# Altium PCB PCB1.PcbDoc
Units mil, origin at the board's own origin, x right, y up, seen from the top; angles counter-clockwise.
Board outline 3275 x 4315 mil, 2 copper layers (Top Layer, Bottom Layer); 25 components, 45 nets, 165 pads, 0 vias.
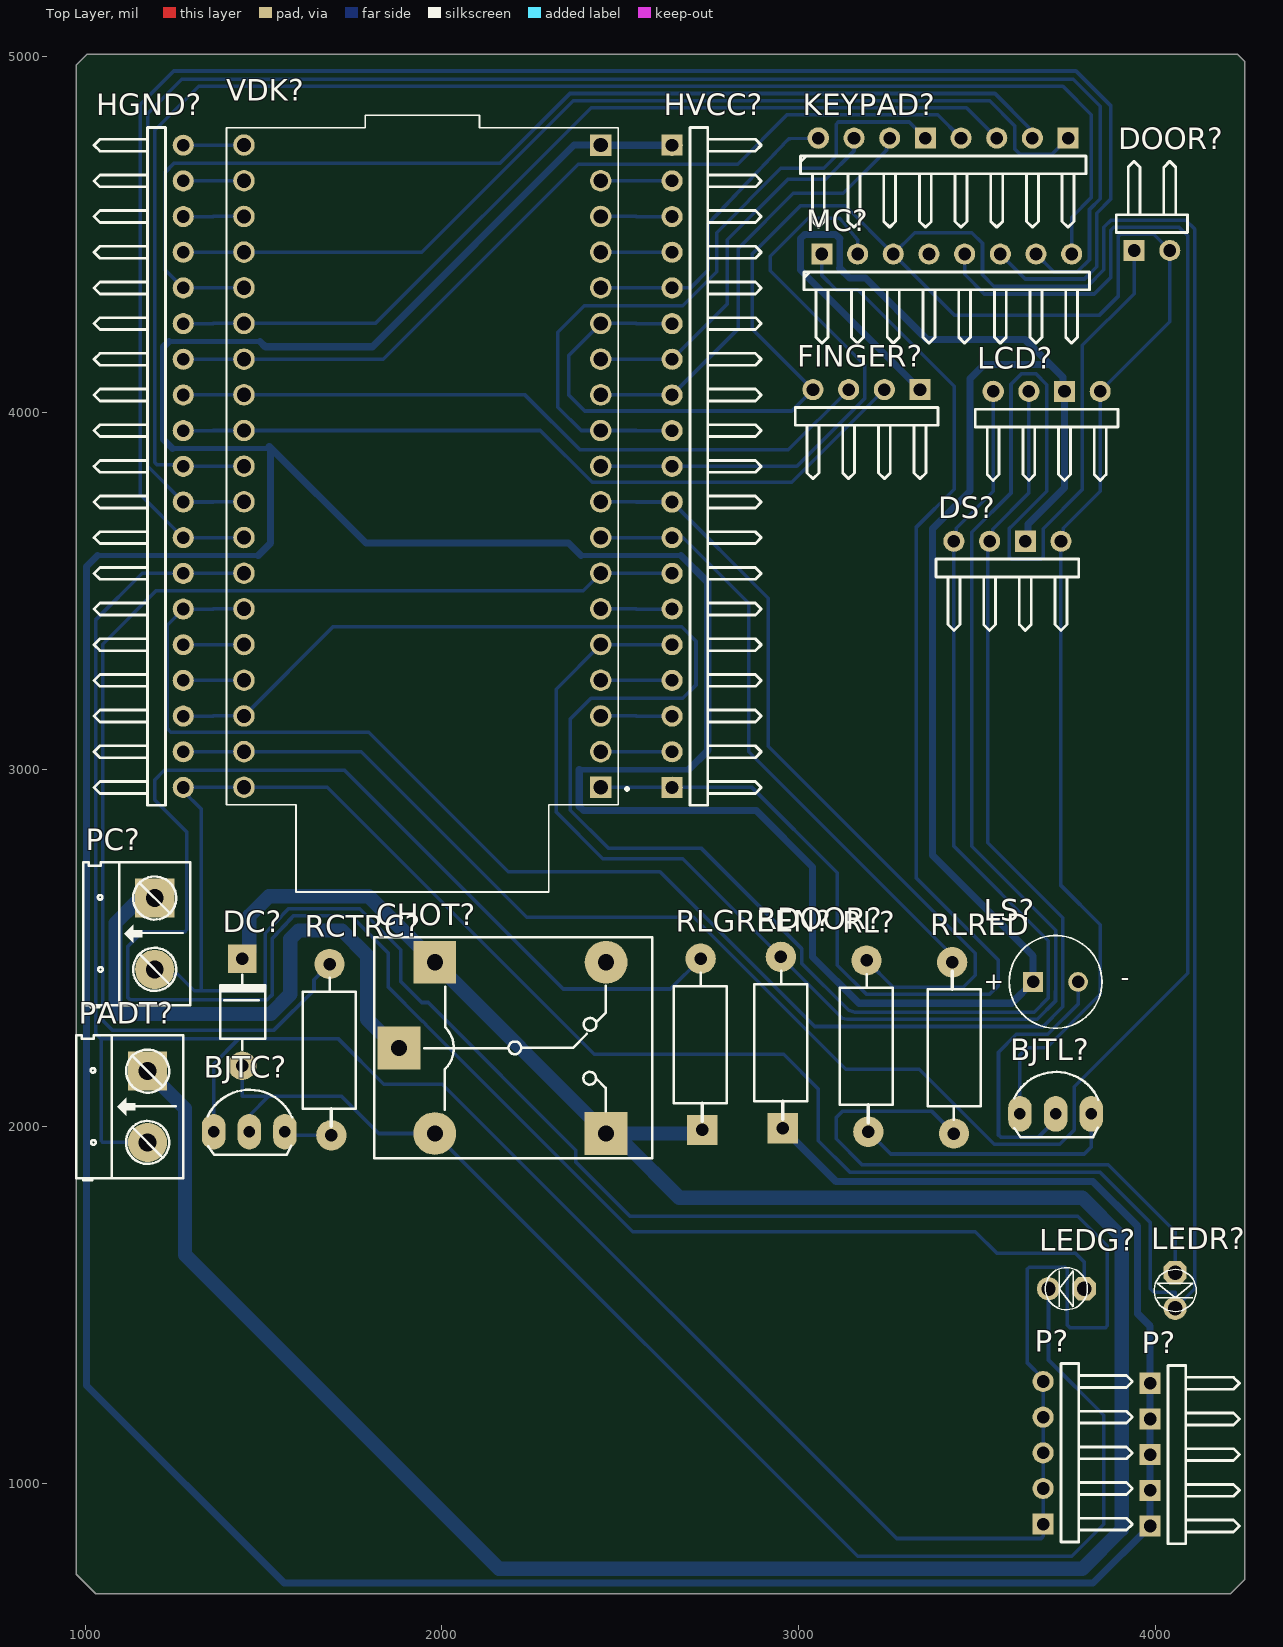
[diagram p0: Top Layer view]
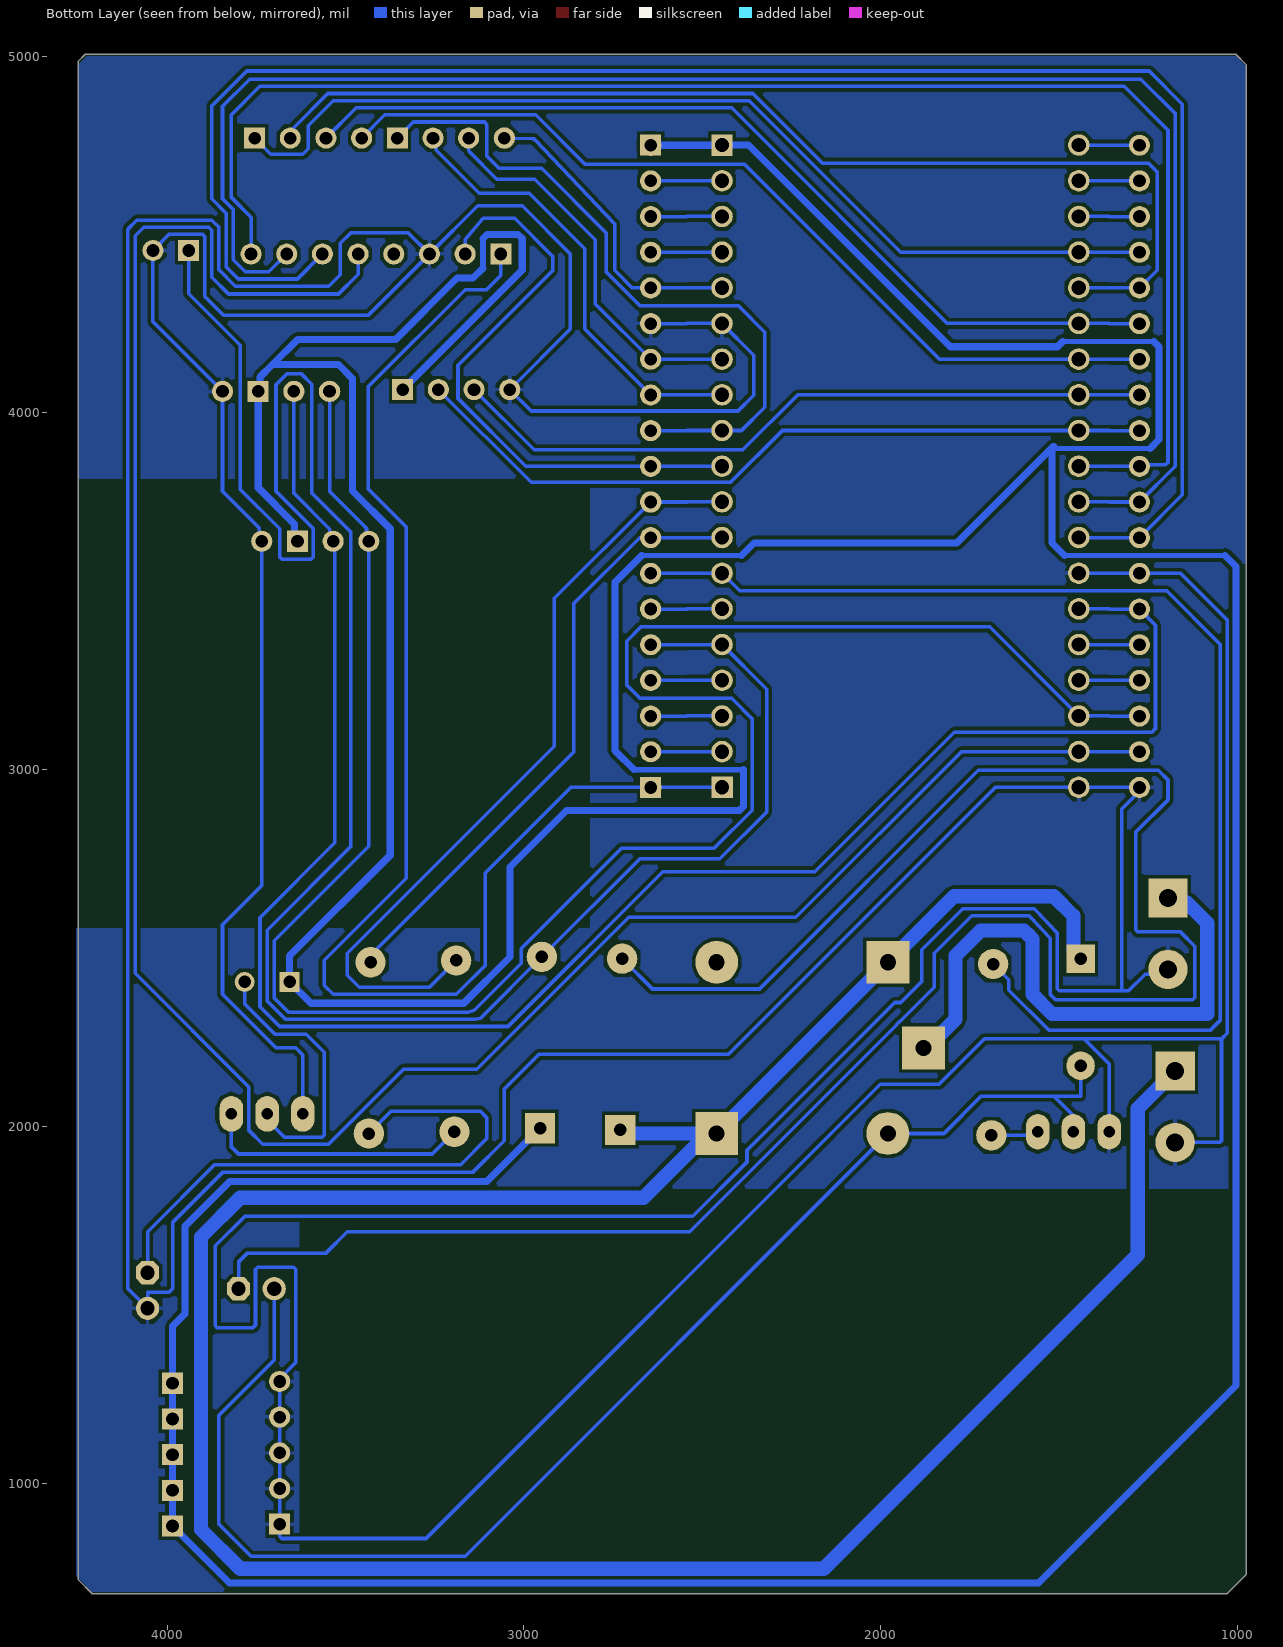
[diagram p1: Bottom Layer view, seen from below]
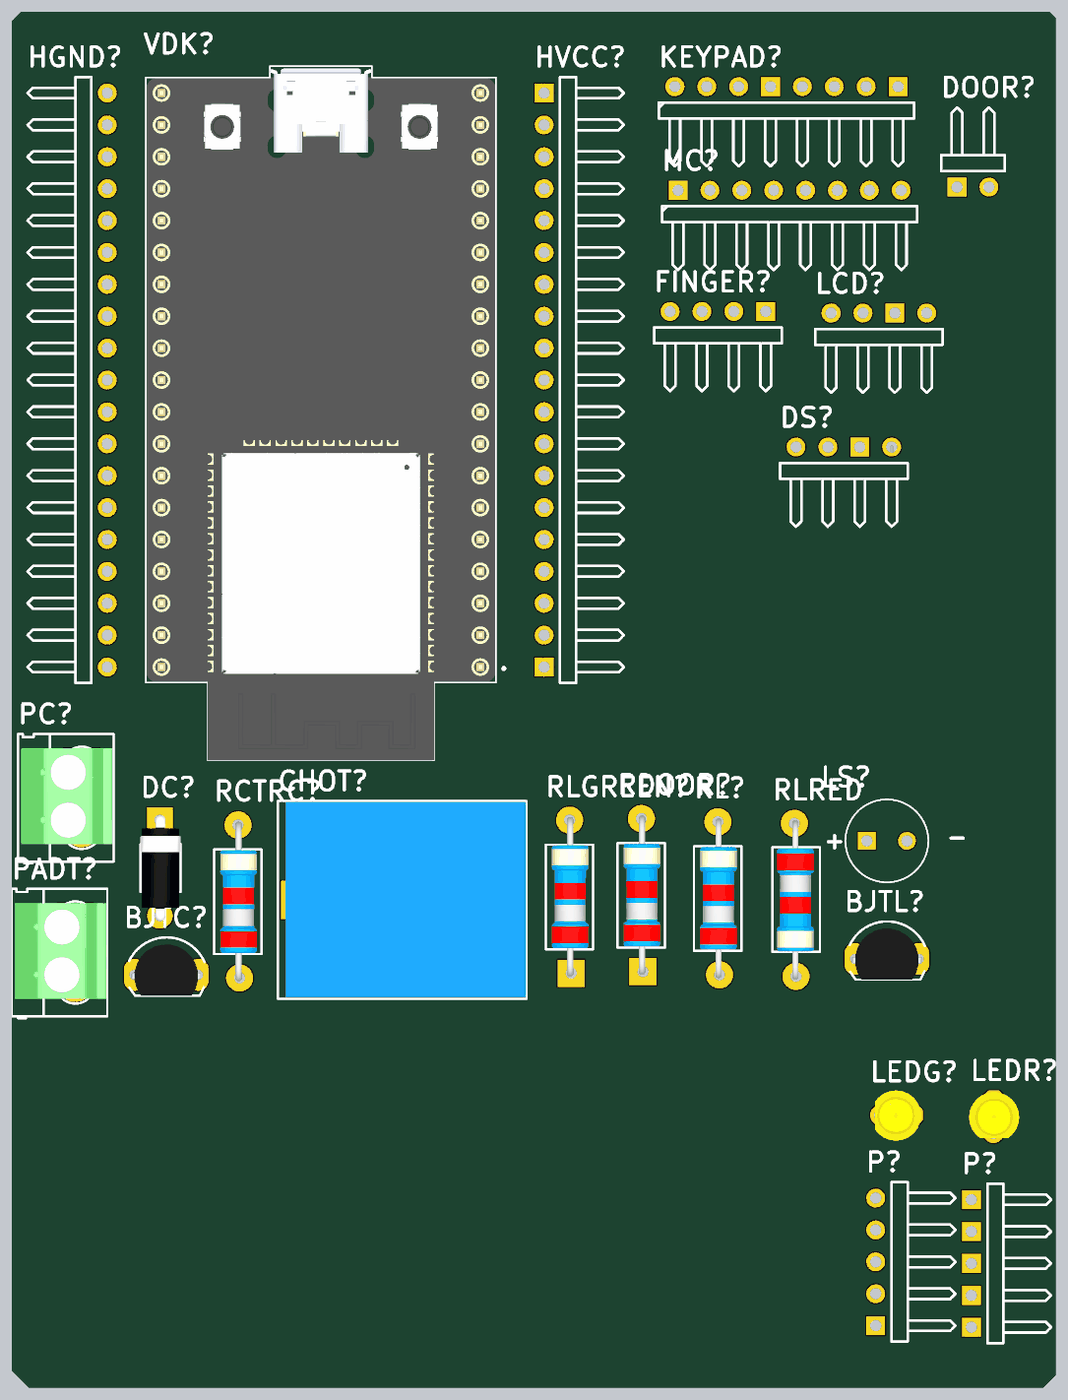
[diagram p2: 3D render of the assembled board from above, using the file's embedded part models]

## Layer stack, top to bottom
Top Solder: solder mask 0.4, Solder Resist, Dk 3.5
Top Layer: signal copper 1.4
Dielectric 1: dielectric 12.6, FR-4, Dk 4.8
Bottom Layer: signal copper 1.4
Bottom Solder: solder mask 0.4, Solder Resist, Dk 3.5

## Board outline
975,745 975,4975 1005,5005 4230,5005 4250,4985 4250,730 4210,690 1030,690

## Design rules (kind name [scope] priority, off if disabled: settings)
Clearance [All] p1: gap=10 ignorepadtopadclearanceinfootprint=FALSE except(0: Arc-Hole Track-Hole SMDPad-Hole THPad-Hole Via-Hole Fill-Hole Poly-Hole Region-Hole Text-Hole)
PolygonConnect [All] p1: connectstyle=Relief reliefconductorwidth=10 reliefentries=4 polygonreliefangle="90 Angle" airgapwidth=10
RoutingVias [All] p1: holewidth=28 width=50 viastyle="Through Hole" minholewidth=28 minwidth=50 maxholewidth=28 maxwidth=50
SolderMaskExpansion [All] p1: expansion=4 istentingtop=FALSE
Width [All] p1: maxlimit=50 minlimit=10 preferedwidth=10 toplayer_maxwidth=10 minimp=50.000000 maximp=50.000000 favimp=50.000000
30 further rules are at their usual default settings.

## Classes and differential pairs
component class Sheet2: BJTC? BJTL? CHOT? DC? DOOR? DS? FINGER? HGND? HVCC? KEYPAD? LCD? LEDG? LEDR? LS? MC? P? PADT? PC? RCTRC? RDOOR? RL? RLRED VDK?

## Components (designator, comment, footprint, x,y, rotation, side; value= is the part's Value field where it differs from the comment)
BJTC? "C1815" TO92 1460,1985 r0 top value=C9014
BJTL? "C1815" TO92 3720,2035 r0 top value=C9014
CHOT? "Relay 10A/12V" "RELAY 5" 2205,2220 r0 top value="Relay SPDT, 10A, 12V"
DC? "100v" "DIODE 1A" 1440,2120 r270 top
DOOR? "Header 2H" HDR1X2H 4040,4455 r180 top
DS? "Header 4H" HDR1X4H#1 3435,3640 r0 top
FINGER? "Header 4H" HDR1X4H#2 3040,4065 r0 top
HGND? "Header 19H" HDR1X19H#1 1275,4750 r270 top
HVCC? "Header 19H" HDR1X19H#2 2645,2950 r90 top
KEYPAD? "Header 8H" HDR1X8H#1 3055,4770 r0 top
LCD? "Header 4H" HDR1X4H#1 3545,4060 r0 top
LEDG? "LED" LED-3MM-YELLOW 3800,1545 r180 top value="LED 3 ly Single Colour"
LEDR? "LED" LED-3MM-YELLOW 4055,1590 r270 top value="LED 3 ly Single Colour"
LS? "CMT-6635C-030" CUI_CMT-6635C-030 3720,2405 r0 top
MC? "Header 8H" HDR1X8H#2 3065,4445 r0 top
P? "Header 5H" HDR1X5H#1 3685,885 r90 top
P? "Header 5H" HDR1X5H#2 3985,880 r90 top
PADT? "CON 2 KF301" "Con 2 KF301 5.08" 1175,1955 r90 top
PC? "CON 2 KF301" "Con 2 KF301 5.08" 1195,2440 r90 top
RCTRC? "Res" RES-1/2W#1 1685,2195 r90 top
RDOOR? "Res" RES-1/2W#2 2950,2215 r90 top
RL? "Res" RES-1/2W#1 3190,2205 r90 top
RLGREEN? "Res" RES-1/2W#2 2725,2210 r90 top
RLRED "Res" RES-1/2W#1 3435,2240 r270 top
VDK? "ESP32-DEVKITC" MODULE_ESP32-DEVKITC 1945,3850 r180 top

## Footprints (in the part's own frame and the unit in brackets; to place one, negate y for a bottom-side part, rotate by r counter-clockwise, add the part's x,y. Pads: shape width x height; smd on the part's side, far side on the other; paste and mask are expansions set on the pad)
"Con 2 KF301 5.08" [mil]
  round 110 hole 50: 1(0,0)
  rect 110x110 hole 50: 2(200,0)
  silkscreen extent -106,-100 300,200, body extent -45,-97 255,190, height 335
CUI_CMT-6635C-030 [mm]
  round 1.408 hole 0.9: N(1.6,0)
  rect 1.408x1.408 hole 0.9: P(-1.6,0)
  silkscreen extent -3.3,-3.3 3.3,3.3
"DIODE 1A" [mil] "Diode 1A"
  round 80 hole 35: 1(-50,0)
  rect 80x80 hole 35: 2(-350,0)
  silkscreen extent -305,-61 -95,65, body extent -366,-61 -34,65, height 122
HDR1X2H [mm] "Connector; Header; 2 Position; Right Angle"
  round 1.5 hole 0.9: 1(0,0)
  rect 1.5x1.5 hole 0.9: 2(2.54,0)
  silkscreen extent -1.27,-6.35 3.81,-1.27
HDR1X4H#1 [mm] "Connector; Header; 4 Position; Right Angle"
  round 1.5 hole 0.9: 1(0,0) 2(2.54,0) 4(7.62,0)
  rect 1.5x1.5 hole 0.9: 3(5.08,0)
  silkscreen extent -1.27,-6.35 8.89,-1.27
HDR1X4H#2 [mm] "Connector; Header; 4 Position; Right Angle"
  round 1.5 hole 0.9: 1(0,0) 2(2.54,0) 3(5.08,0)
  rect 1.5x1.5 hole 0.9: 4(7.62,0)
  silkscreen extent -1.27,-6.35 8.89,-1.27
HDR1X5H#1 [mm] "Connector; Header; 5 Position; Right Angle"
  rect 1.5x1.5 hole 0.9: 1(0,0)
  round 1.5 hole 0.9: 2(2.54,0) 3(5.08,0) 4(7.62,0) 5(10.16,0)
  silkscreen extent -1.27,-6.35 11.43,-1.27
HDR1X5H#2 [mm] "Connector; Header; 5 Position; Right Angle"
  rect 1.5x1.5 hole 0.9: 1(0,0) 2(2.54,0) 3(5.08,0) 4(7.62,0) 5(10.16,0)
  silkscreen extent -1.27,-6.35 11.43,-1.27
HDR1X8H#1 [mm] "Connector; Header; 8 Position; Right Angle"
  round 1.5 hole 0.9: 1(0,0) 2(2.54,0) 3(5.08,0) 5(10.16,0) 6(12.7,0) 7(15.24,0)
  rect 1.5x1.5 hole 0.9: 4(7.62,0) 8(17.78,0)
  silkscreen extent -1.27,-6.35 19.05,-1.27
HDR1X8H#2 [mm] "Connector; Header; 8 Position; Right Angle"
  rect 1.5x1.5 hole 0.9: 1(0,0)
  round 1.5 hole 0.9: 2(2.54,0) 3(5.08,0) 4(7.62,0) 5(10.16,0) 6(12.7,0) 7(15.24,0) 8(17.78,0)
  silkscreen extent -1.27,-6.35 19.05,-1.27
HDR1X19H#1 [mm] "Connector; Header; 19 Position; Right Angle"
  round 1.5 hole 0.9: 1(0,0) 2(2.54,0) 3(5.08,0) 4(7.62,0) 5(10.16,0) 6(12.7,0) 7(15.24,0) 8(17.78,0) 9(20.32,0) 10(22.86,0) 11(25.4,0) 12(27.94,0) 13(30.48,0) 14(33.02,0) 15(35.56,0) 16(38.1,0) 17(40.64,0) 18(43.18,0) 19(45.72,0)
  silkscreen extent -1.27,-6.35 46.99,-1.27
HDR1X19H#2 [mm] "Connector; Header; 19 Position; Right Angle"
  rect 1.5x1.5 hole 0.9: 1(0,0) 19(45.72,0)
  round 1.5 hole 0.9: 2(2.54,0) 3(5.08,0) 4(7.62,0) 5(10.16,0) 6(12.7,0) 7(15.24,0) 8(17.78,0) 9(20.32,0) 10(22.86,0) 11(25.4,0) 12(27.94,0) 13(30.48,0) 14(33.02,0) 15(35.56,0) 16(38.1,0) 17(40.64,0) 18(43.18,0)
  silkscreen extent -1.27,-6.35 46.99,-1.27
LED-3MM-YELLOW [mil]
  oct 65x65 hole 40: 1(0,0)
  round 65 hole 40: 2(100,0)
  silkscreen extent -9,-59 109,59, body extent -27,-77 117,80, height 181
MODULE_ESP32-DEVKITC [mm]
  rect 1.53x1.53 / inner round 1.53 / far side rect 1.53x1.53 hole 1.02: 1(-12.7,22.85)
  round 1.53 hole 1.02: 2(-12.7,20.31) 3(-12.7,17.77) 4(-12.7,15.23) 5(-12.7,12.69) 6(-12.7,10.15) 7(-12.7,7.61) 8(-12.7,5.07) 9(-12.7,2.53) 10(-12.7,-0.01) 11(-12.7,-2.55) 12(-12.7,-5.09) 13(-12.7,-7.63) 14(-12.7,-10.17) 15(-12.7,-12.71) 16(-12.7,-15.25) 17(-12.7,-17.79) 18(-12.7,-20.33) 19(-12.7,-22.87) 20(12.7,-22.87) 21(12.7,-20.33) 22(12.7,-17.79) 23(12.7,-15.25) 24(12.7,-12.71) 25(12.7,-10.17) 26(12.7,-7.63) 27(12.7,-5.09) 28(12.7,-2.55) 29(12.7,-0.01) 30(12.7,2.53) 31(12.7,5.07) 32(12.7,7.61) 33(12.7,10.15) 34(12.7,12.69) 35(12.7,15.23) 36(12.7,17.77) 37(12.7,20.31) 38(12.7,22.85)
  silkscreen extent -14.67,-25 13.95,30.3, body extent -13.97,-24.8 13.97,30.3, height 3.25
"RELAY 5" [mil] "Reley DPDT, 8 pin, 1A, W400mil, L800mil,H 300mil"
  rect 120x120 hole 45: 1(-325,0) 3(255,-240) 5(-225,240)
  round 120 hole 45: 2(255,240) 4(-225,-240)
  silkscreen extent -395,-310 385,310, body extent -371,-304 381,306, height 602
RES-1/2W#1 [mil]
  round 85 hole 35: 1(-220,-5) 2(260,0)
  silkscreen extent -195,-74 221,75, body extent -230,-60 270,56, height 121
RES-1/2W#2 [mil]
  rect 85x85 hole 35: 1(-220,-5)
  round 85 hole 35: 2(260,0)
  silkscreen extent -195,-74 221,75, body extent -230,-60 270,56, height 121
TO92 [mil] "TO-92"
  oval 66x100 hole 32: 1(-100,0) 2(0,0) 3(100,0)
  silkscreen extent -117,-65 120,118, body extent -109,-66 109,95, height 245

## Part data
BJTC? BJTL?: "NPN transistor"
CHOT?: library part "Relay 5", "Relay SPDT,10A - 12VDC 5 Pin"
DC?: library part "Diode 1N4007", "Cắm", Chung_Loai=Cắm, Don_Vi=Con, Ma_Hang=MH001063, Ten_Linh_Kien="Diode 1N4007 1A (DIP)"
DOOR?: "Header, 2-Pin, Right Angle", LatestRevisionDate=17-Jul-2002, LatestRevisionNote="Re-released for DXP Platform.", Publisher="Altium Limited"
DS? FINGER? LCD?: "Header, 4-Pin, Right Angle", LatestRevisionDate=17-Jul-2002, LatestRevisionNote="Re-released for DXP Platform.", Publisher="Altium Limited"
HGND? HVCC?: "Header, 19-Pin, Right Angle", LatestRevisionDate=17-Jul-2002, LatestRevisionNote="Re-released for DXP Platform.", Publisher="Altium Limited"
KEYPAD? MC?: "Header, 8-Pin, Right Angle", LatestRevisionDate=17-Jul-2002, LatestRevisionNote="Re-released for DXP Platform.", Publisher="Altium Limited"
LEDG? LEDR?: "LED Single colour Green and Red"
LS?: "6.6 mm, 3 Vo-p, 80 dB, Through Hole, Magnetic Audio Transducer Buzzer", Package="CUI Inc.", Availability=Unavailable, CUI_purchase_URL=https://www.cuidevices.com/product/audio/buzzers/audio-transducers/cmt-6635c-030?utm_source=snapeda.com&utm_medium=referral&utm_campaign=snapedaBOM, MF="CUI Devices", MP=CMT-6635C-030, Price=None, SnapEDA_Link=https://www.snapeda.com/parts/CMT-6635C-030/CUI%20Devices/view-part/2773120/?ref=snap
P? P?: "Header, 5-Pin, Right Angle", LatestRevisionDate=17-Jul-2002, LatestRevisionNote="Re-released for DXP Platform.", Publisher="Altium Limited"
PADT? PC?: "Cắm", Chung_Loai=Cắm, Don_Vi=Con, Ma_Hang=MH000987, Ten_Linh_Kien="CON 2 KF301-2P 5.08MM Xanh Dương"
RCTRC? RDOOR? RL? RLGREEN? RLRED: Manufacturer="Generic Components", Class=Passive, Published=08/06/2000, Publisher="Altium Hobart Technology Centre", SubClass=R
VDK?: "ESP32-WROOM-32UE series Transceiver; 802.11 b/g/n (Wi-Fi, WiFi, WLAN), Bluetooth Â® Smart Ready 4.x Dual Mode Evaluation Board", Package=None, Availability="In Stock", Check_prices=https://www.snapeda.com/parts/ESP32-DEVKITC/Espressif+Systems/view-part/?ref=eda, MF="Espressif Systems", MP=ESP32-DEVKITC, Price=None, Purchase-URL=https://pricing.snapeda.com/search/part/ESP32-DEVKITC/?ref=eda, SnapEDA_Link=https://www.snapeda.com/parts/ESP32-DEVKITC/Espressif+Systems/view-part/?ref=snap

## Free pads (board coordinates)
  round 60 hole 30: 62(2460,2460) 64(2725,2470) 67(3190,2465) 90(2445,2950.39) 91(2645,2950) 93(2445,3050.39) 94(2445,3150.39) 106(2645,3750) 118(2445,4250.39) 122(2445,4450.39) 123(2445,4550.39) 125(2445,4650.39) 127(2645,4750) 129(3055,4770) 152(3545,4060)
  rect 60x60 hole 30: 126(2445,4750.39)

## Nets (pads, with @x,y where several pads share a name; then routed paths per layer and width w, separated by ;. In a path a pad name is that pad's centre, name@x,y a point inside that pad or via, vN(x,y) a via of type N, cw(c..) or ccw(c..) an arc to the next point about the centre after c; other vN are vias at no path point)
3V3: HVCC?.1 MC?.1 pad.90 pad.91 VDK?.1 | length 3895.1
  Bottom Layer w10: pad.90 2612.62,2950.39 2613.02,2950 pad.91 2869,2950 3108,2711 3108,2452 3190,2370 3534.69,2370 3559.75,2395.06 3559.75,2465.25 3330,2695 3330,3680 3436,3786 3436,4074 3165,4345 3105,4345 3065,4385 MC?.1
12V: CHOT?.3 CHOT?.5 DC?.2 PADT?.2 RLGREEN?.1 | length 7662.2
  Bottom Layer w10: RLGREEN?.1@2730,1980 RLGREEN?.1
  Bottom Layer w40: PADT?.2 1280,2050 1280,1640 2160,760 3795,760 3905,870 3905,1690 3795,1800 2665,1800 2517.35,1947.65 2514,1947.65 2485,1976.65 CHOT?.3@2485,1980 ; DC?.2 1460,2490 1460,2590 1515,2645 1795,2645 CHOT?.5 CHOT?.3 CHOT?.3@2485,1980 ; RLGREEN?.1@2730,1980 CHOT?.3@2485,1980
BUZZER: HVCC?.9 pad.67 pad.106 RL?.2 VDK?.9 | length 2228.7
  Bottom Layer w10: VDK?.9 2544,3750.39 2544.39,3750 pad.106 2915,3480 2915,3065 3495,2485 3495,2423.5 3461.5,2390 3265,2390 pad.67
C0: HVCC?.11 KEYPAD?.4 VDK?.11 | length 1966.6
  Bottom Layer w10: HVCC?.11 2544.39,3950 2544,3950.39 VDK?.11 2390.61,3950.39 2325,4016 2325,4226 2399,4300 2675,4300 2770,4395 2770,4505 2950,4685 3070,4685 3105,4720 3105,4809.14 3110.86,4815 3310,4815 KEYPAD?.4
C1: HVCC?.12 KEYPAD?.3 VDK?.12 | length 1254.8
  Bottom Layer w10: VDK?.12 2544,4050.39 2544.39,4050 HVCC?.12 2830,4235 2830,4460 2985,4615 3125,4615 3246.01,4736.01 3246.01,4761.01 KEYPAD?.3
C2: HVCC?.13 KEYPAD?.2 VDK?.13 | length 1093.5
  Bottom Layer w10: VDK?.13 2544,4150.39 2544.39,4150 HVCC?.13 2800,4305 2800,4485 2970,4655 3076,4655 3155,4734 KEYPAD?.2
C3: HVCC?.15 KEYPAD?.1 pad.129 VDK?.15 | length 863.2
  Bottom Layer w10: VDK?.15 2544,4350.39 2544.39,4350 HVCC?.15 2696.72,4350 2745.86,4399.14 2745.86,4525.16 2745.86,4529.14 2969.08,4764.83 2972,4767.75 2975.98,4767.85 pad.129
CLK: HGND?.11 MC?.7 VDK?.30 | length 4669
  Bottom Layer w10: VDK?.30 1359.39,3750.39 1359,3750 HGND?.11 1175,3850 1175,4839 1271,4935 3769,4935 3845,4859 3845,4600 3815,4570 3815,4429 3781,4395 3715,4395 MC?.7
CRX: HGND?.16 VDK?.35 | length 170.2
  Bottom Layer w10: HGND?.16 1359,3250 1359.39,3250.39 VDK?.35
CTRL_C: HVCC?.7 RCTRC?.2 VDK?.7 | length 3474.2
  Bottom Layer w10: RCTRC?.2 1641.39,2411.39 1641.39,2381.89 1529.5,2270 1075.86,2270 1049.14,2296.72 1049.14,3351.72 1198.42,3501 2395.61,3501 VDK?.7 2477.16,3550.39 2477.56,3550 HVCC?.7
CTX: HGND?.15 VDK?.34 | length 170.2
  Bottom Layer w10: HGND?.15 1359,3350 1359.39,3350.39 VDK?.34
DOOR: DOOR?.2 HVCC?.5 RDOOR?.2 VDK?.5 | length 5969.4
  Bottom Layer w10: HVCC?.5 2544.39,3350 2544,3350.39 VDK?.5 2320,3225.39 2320,2881 2451,2750 2675,2750 RDOOR?.2 3122.07,2302.93 3135.74,2300.19 3137.71,2300 3668.28,2300 3719.72,2351.44 3719.72,2364 3719.72,2364.08 3720,2397.02 3720,2550 3485,2785 3485,3665 3595,3775 3595,4080 3625,4110 3664,4110 3695,4079 3695,3780.27 3602.6,3687.87 3590.47,3675.74 3590.47,3595.86 3596.33,3590 3679.14,3590 3685,3595.86 3685,3675 3795,3785 3795,4189 3940,4334 DOOR?.2
GND: BJTC?.1 BJTL?.1 DOOR?.1 DS?.4 FINGER?.1 HGND?.13 HGND?.19 HVCC?.14 LCD?.4 LEDR?.2 MC?.3 P?.1@3685,885 P?.2@3685,985 P?.3@3685,1085 P?.4@3685,1185 P?.5@3685,1285 pad.118 PADT?.1 PC?.1 VDK?.14 VDK?.32 VDK?.38 | length 24588
  Bottom Layer w10: PADT?.1 1050,1955 1045,1960 1045,2245 ; PC?.1 1208.28,2426.72 1259.14,2426.72 1305.86,2380 1325,2380 ; BJTC?.1 1360,2175 1430,2245 ; VDK?.32 1359.39,3550.39 1359,3550 HGND?.13 1160,3550 1029.14,3419.14 1029.14,2260.86 1045,2245 ; HVCC?.14 2544.39,4250 2544,4250.39 pad.118 2356,4161.39 2356,4049 2400,4005 2980,4005 FINGER?.1 2870,4235 2870,4445 3005,4580 3130,4580 MC?.3 ; BJTL?.1 3620,2200 3640,2220 3695,2220 3845,2370 3845,2565 3735,2675 DS?.4 3741.49,3646.49 3741.49,3676.49 3845,3780 LCD?.4 4040,4255 DOOR?.1 3995,4500 3900.86,4500 3895,4494.14 3895,4326 3843,4274 3436,4274 MC?.3 ; 1045,2245 1430,2245 ; 1325,2380 1499.14,2380 1505,2385.86 1505,2540.86 1564.14,2604.14 1570,2610 1770,2610 1885,2495 1885,2405.86 1943.64,2347.22 1961.24,2347.22 2375,1933.46 2375,1900 2527,1748 3782,1748 3865,1665 3865,1440.86 3859.14,1435 3760.86,1435 3752.5,1443.36 3752.5,1599.14 3746.64,1605 3645.86,1605 3640,1599.14 3640,1338 3685,1293 3685,1285 3685,1185 3685,1085 3685,985 3685,885 3685,850.86 3682.07,847.93 3679.14,845 3274.6,845 2001.21,2118.39 1836.61,2118.39 1710,2245 1430,2245 ; 1325,2380 1325,2889.61 1275,2939.61 HGND?.19 1372,2950 1372.39,2950.39 VDK?.38 1678.61,2950.39 2427,2202 2958,2202 3055,2105 3055,1960 3143,1872 3843.64,1872 3985,1730.64 3985,1545 3995,1535 4055,1535 LEDR?.2 4110,1545 4110,4515 4085,4540 3875,4540 3855,4520 3855,4400.72 3809.28,4355 3547,4355 3515,4387 3515,4475 3485,4505 3325,4505 MC?.3
LEDR: HVCC?.8 RLRED.1 VDK?.8 | length 1733.4
  Bottom Layer w10: VDK?.8 2544,3650.39 2544.39,3650 HVCC?.8 2675.93,3650 2860,3465.93 2860,3050 3430,2480 RLRED.1
MISO: HGND?.12 MC?.6 VDK?.31 | length 5014.9
  Bottom Layer w10: VDK?.31 1359,3650.39 1359,3650 HGND?.12 1155,3770 1155,4865 1248,4958 3777,4958 3875,4860 3875,4599.53 3835,4559.53 3835,4409 3801,4375 3635,4375 MC?.6
MOSI: HGND?.18 MC?.5 VDK?.37 | length 6476.6
  Bottom Layer w10: HGND?.18 1359,3050 1359.39,3050.39 VDK?.37 1773.61,3050.39 2238,2586 2706,2586 3132,2160 3337.93,2160 3547.93,1950 3732,1950 3772,1990 3772,2111 4090,2429 4090,4496 4066,4520 3883.28,4520 3875,4511.72 3875,4380 3828,4333 3520,4333 3465,4388 MC?.5
NetBJTC?_2: BJTC?.2 CHOT?.4 DC?.1 LEDG?.2 | length 3939.9
  Bottom Layer w10: DC?.1 1440,2085 1515,2085 ; BJTC?.2 1460,2030 1515,2085 ; LEDG?.2@3700,1566.32 3700,1345 3855,1190 3855,885 3765,795 3165,795 CHOT?.4 1823,1980 1718,2085 1515,2085
NetBJTC?_3: BJTC?.3 RCTRC?.1 | length 134.1
  Bottom Layer w10: BJTC?.3 1570,1975 RCTRC?.1
NetBJTL?_2: BJTL?.2 LS?.N | length 772.4
  Bottom Layer w10: BJTL?.2 3720,2018 3672,1970 3565.86,1970 3560,1975.86 3560,2208 3610,2258 3698,2258 3782.99,2342.99 LS?.N
NetBJTL?_3: BJTL?.3 RL?.1 | length 751.9
  Bottom Layer w10: RL?.1 3257.5,1922.5 3800.43,1922.5 3820,1942.07 BJTL?.3
NetHGND?_1: HGND?.1 VDK?.20 | length 170.2
  Bottom Layer w10: HGND?.1 1359,4750 1359.39,4750.39 VDK?.20
NetHGND?_2: HGND?.2 VDK?.21 | length 170.2
  Bottom Layer w10: HGND?.2 1359,4650 1359.39,4650.39 VDK?.21
NetHGND?_3: HGND?.3 VDK?.22 | length 170.2
  Bottom Layer w10: HGND?.3 1359,4550 1359.39,4550.39 VDK?.22
NetHVCC?_2: HVCC?.2 pad.93 VDK?.2 | length 200.2
  Bottom Layer w10: pad.93 2544,3050.39 2544.39,3050 HVCC?.2
NetHVCC?_3: HVCC?.3 pad.94 VDK?.3 | length 200.2
  Bottom Layer w10: pad.94 2544,3150.39 2544.39,3150 HVCC?.3
NetHVCC?_4: HVCC?.4 VDK?.4 | length 200.2
  Bottom Layer w10: VDK?.4 2544,3250.39 2544.39,3250 HVCC?.4
NetHVCC?_6: HVCC?.6 VDK?.6 | length 200.2
  Bottom Layer w10: VDK?.6 2544,3450.39 2544.39,3450 HVCC?.6
NetHVCC?_16: HVCC?.16 pad.122 VDK?.16 | length 200.2
  Bottom Layer w10: pad.122 2544,4450.39 2544.39,4450 HVCC?.16
NetHVCC?_17: HVCC?.17 pad.123 VDK?.17 | length 200.2
  Bottom Layer w10: pad.123 2544,4550.39 2544.39,4550 HVCC?.17
NetHVCC?_18: HVCC?.18 pad.125 VDK?.18 | length 200.2
  Bottom Layer w10: pad.125 2544,4650.39 2544.39,4650 HVCC?.18
NetLEDG?_1: LEDG?.1 pad.64 RLGREEN?.2 | length 6022.3
  Bottom Layer w10: pad.64 2640,2385 2340,2385 1727,2998 1222,2998 1195,2971 1195,2915 1285,2825 1285,2550.86 1279.14,2545 1160,2545 1120,2505 1120,2360.86 1125.86,2355 1510.5,2355 1525,2369.5 1525,2526.92 1578.08,2584.14 1583.93,2590 1745,2590 1850,2485 1850,2390 1945,2295 1946.21,2295 1955,2286.21 1955,2285 2535,1705 3495,1705 3555,1645 3775,1645 3800,1620 LEDG?.1
NetLEDR?_1: LEDR?.1 RLRED.2 | length 1596.2
  Bottom Layer w10: RLRED.2 3372,2043 3123,2043 3105,2025 3105,1965 3177.4,1892.6 3867.4,1892.6 4055,1705 LEDR?.1
PC: CHOT?.1 PC?.2 | length 1618.2
  Bottom Layer w10: 1084.14,2315.86 1085,2315
  Bottom Layer w40: PC?.2 1181.61,2626.61 1141.61,2626.61 1085,2570 1085,2315 1520,2315 1575,2370 1575,2525.33 1586.72,2537.05 1598.43,2548.76 1719.87,2548.76 1790.54,2478.09 1790.54,2300.54 1871.09,2220 CHOT?.1
R0: HGND?.4 KEYPAD?.8 VDK?.23 | length 2774.9
  Bottom Layer w10: HGND?.4 1359,4450 1359.39,4450.39 VDK?.23 1943.87,4450.39 2368.47,4875 3535,4875 3605,4805 3605,4740 3620,4725 3710,4725 KEYPAD?.8
R1: HGND?.5 KEYPAD?.7 VDK?.24 | length 3100.5
  Bottom Layer w10: VDK?.24 1359.39,4350.39 1359,4350 HGND?.5 1225,4400 1225,4675 1250,4700 2163.78,4700 2358.78,4895 3550,4895 3645.61,4799.39 3645.61,4779.39 KEYPAD?.7
R2: HGND?.6 KEYPAD?.6 VDK?.25 | length 2565.8
  Bottom Layer w10: HGND?.6 1359,4250 1359.39,4250.39 VDK?.25 1813.55,4250.39 2418.16,4855 3470,4855 KEYPAD?.6
R3: HGND?.7 KEYPAD?.5 VDK?.26 | length 2490.7
  Bottom Layer w10: HGND?.7 1359,4150 1359.39,4150.39 VDK?.26 1835.39,4150.39 2382,4697 2829.04,4697 2967.04,4835 3390,4835 KEYPAD?.5
RQ: MC?.4
RSTSPI: HVCC?.10 MC?.2 VDK?.10 | length 1684.5
  Bottom Layer w10: VDK?.10 2475,3850.39 2475,3850 HVCC?.10 2995,3850 3185,4040 3185,4133.34 2920,4398.34 2920,4438.64 3026.36,4545 3114.61,4545 3117.54,4542.07 3117.87,4541.74 3165,4485 MC?.2
RX2: FINGER?.2 HGND?.8 VDK?.27 | length 1999.2
  Bottom Layer w10: HGND?.8 VDK?.27@1445,4050 ; VDK?.27 VDK?.27@1445,4050 ; FINGER?.2 2971,3896 2387,3896 2233,4050 VDK?.27@1445,4050
SCL: DS?.1 HGND?.17 LCD?.1 pad.152 VDK?.36 | length 5796.1
  Bottom Layer w10: HGND?.17 1359,3150 1359.39,3150.39 VDK?.36 1694.61,3400 2672,3400 2712,3360 2712,3237 2675,3200 2418,3200 2360,3142 2360,2886.36 2466.36,2780 2726.32,2780 3008,2498.32 3008,2457 3139.84,2325.16 3157.03,2320.37 3159.52,2320 3660,2320 3699.72,2359.72 3699.72,2520.28 3435,2785 DS?.1 3441.49,3646.49 3441.49,3676.49 3545,3780 LCD?.1
SDA: DS?.2 HGND?.14 LCD?.2 VDK?.33 | length 5262.1
  Bottom Layer w10: VDK?.33 1359.39,3450.39 1359,3450 HGND?.14 1230,3405 1230,3115 1240,3105 1794.53,3105 2185.53,2714 2611,2714 3045,2280 3685,2280 3740,2335 3740,2585 3530,2795 3530,3545.72 3530,3635 3543.99,3648.99 3543.99,3673.99 3645,3775 LCD?.2
SS: HGND?.10 MC?.8 VDK?.29 | length 4308
  Bottom Layer w10: VDK?.29 1359.39,3850.39 1359,3850 HGND?.10 1270,3855 1200.86,3855 1195,3860.86 1195,4792 1318,4915 3740.54,4915 3820,4835.54 3820,4603.29 3765,4548.29 MC?.8
TX2: FINGER?.3 HGND?.9 VDK?.28 | length 2133.1
  Bottom Layer w10: HGND?.9 1359,3950 1359.39,3950.39 VDK?.28 2275.61,3950.39 2421,3805 2980,3805 FINGER?.3
VCC: DS?.3 FINGER?.4 HVCC?.19 LCD?.3 LS?.P P?.1@3985,880 P?.2@3985,980 P?.3@3985,1080 P?.4@3985,1180 P?.5@3985,1280 pad.126 pad.127 RDOOR?.1 VDK?.19 | length 18734.5
  Bottom Layer w15: 1035,3600 1485.14,3600 ; 1235,4200 1490,4200 ; 1245,3900 1520,3900 ; 2385,3000 2692,3000 ; 2390,3600 2670,3600
  Bottom Layer w18: 3115.02,4405 3115.02,4488.28
  Bottom Layer w20: 1035,3600 1004.14,3569.14 1004.14,1273.86 1558,720 3825,720 3985,880 P?.2@3985,980 ; 1235,4200 1220,4185 1220,3925 1245,3900 ; 1485.14,3600 1520,3634.86 1520,3900 1515,3905 ; 1490,4200 1505,4185 1805,4185 1820,4200 2370.39,4750.39 pad.126 ; 1517,3905 1787,3635 2355,3635 2390,3600 ; 2385,3000 2385,2896.72 2396.72,2885 2881,2885 3039,2727 3039,2475 3169,2345 3597.01,2345 LS?.P 3657.01,2477.99 3375,2760 3375,3675 3480.47,3780.47 3480.47,4095.47 3520,4135 3705,4135 ; pad.126@2445,4750 pad.127 ; 2670,3600 2745,3525 2745,3053 2692,3000 ; RDOOR?.1 3105,1845 3825,1845 3950,1720 3950,1475 3985,1440 3985,1280 3985,1180 3985,1080 3985,998.04 3979.17,992.22 3972.78,992.22 P?.2@3972.78,978.35 ; 3115.02,4405 3142.52,4377.5 3187.5,4377.5 3360,4205 3635,4205 3705,4135 ; 3115.02,4488.28 3109.16,4494.14 3103.3,4500 3016.72,4500 3005,4488.28 3005,4400 FINGER?.4 ; DS?.3 3642.81,3647.81 3642.81,3687.81 3745,3790 LCD?.3 3740.41,4064.59 3740.41,4099.59 3705,4135
pads on no net: CHOT?.2

## Polygon pours and split planes (outlines as drawn)
GND on Bottom Layer "NONET_L02_P-001" (solid, pour order 0): 975,1825 3630,1825 3630,695 4210,695 4255,740 4255,2555 2820,2555 2815,2560 2815,3815 4247.54,3815 4249.53,3813.02 4250,3813.49 4250,4975 4225,5000 1005,5000 975,4970

## Text inside footprints (layer, text, board x,y; h text height)
LS?: Top Overlay "+" at 3518.5,2382.48 h50.18; Top Overlay "-" at 3902.69,2393.89 h50.14